# EAGLE board BasesXBee (EAGLE 5.07)
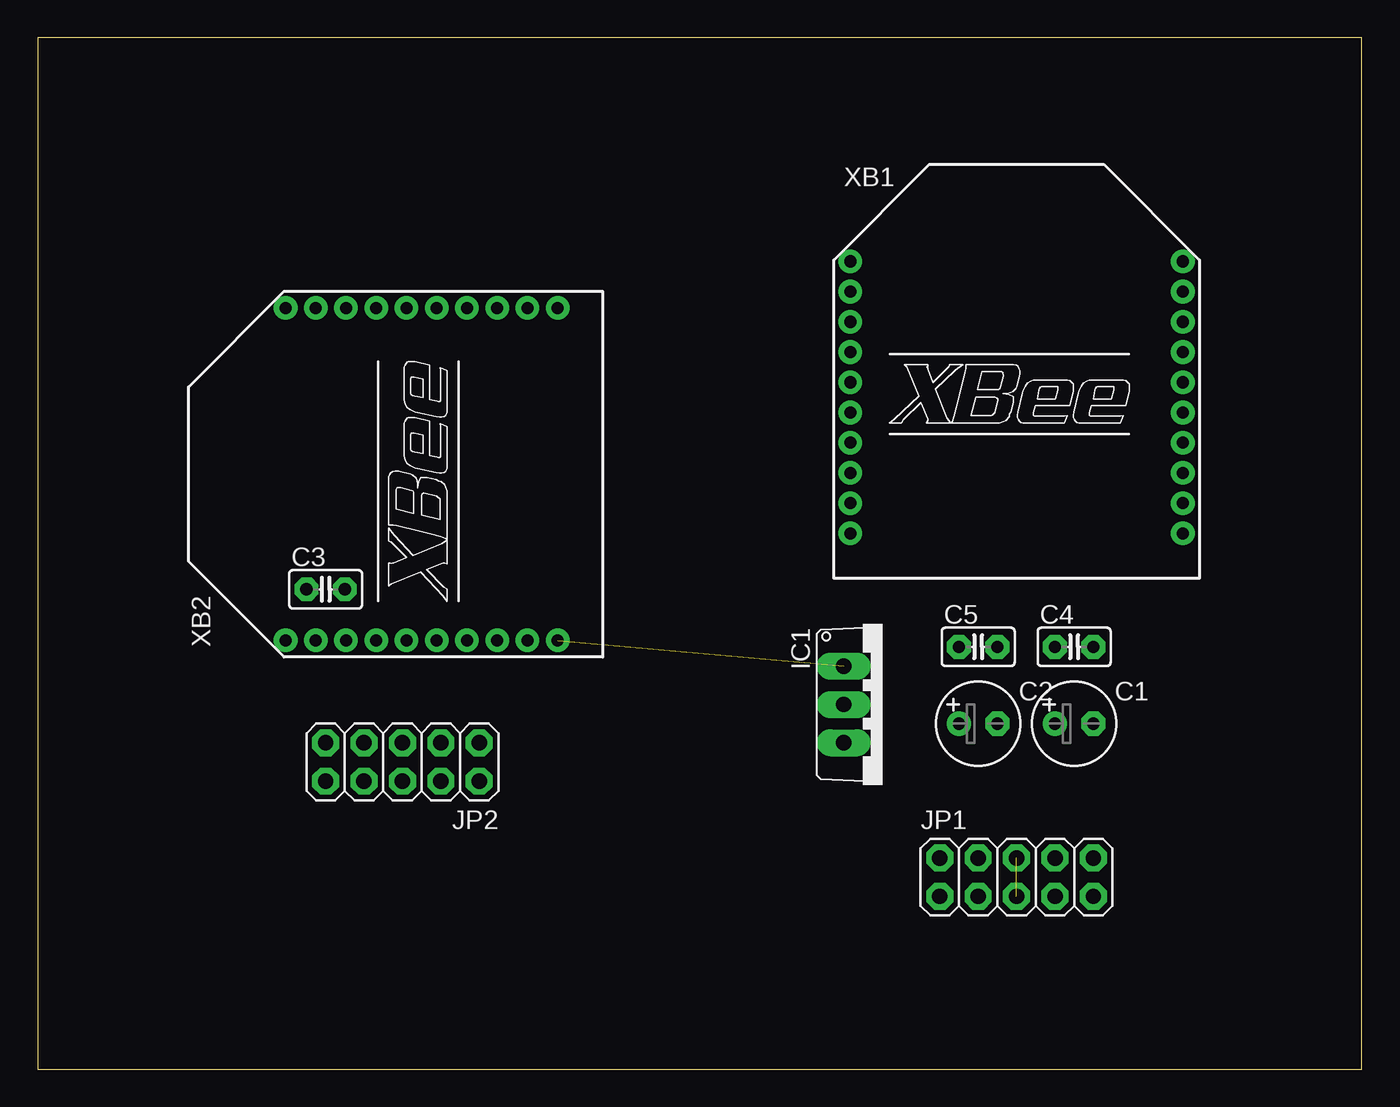
[diagram p0: board, top side]
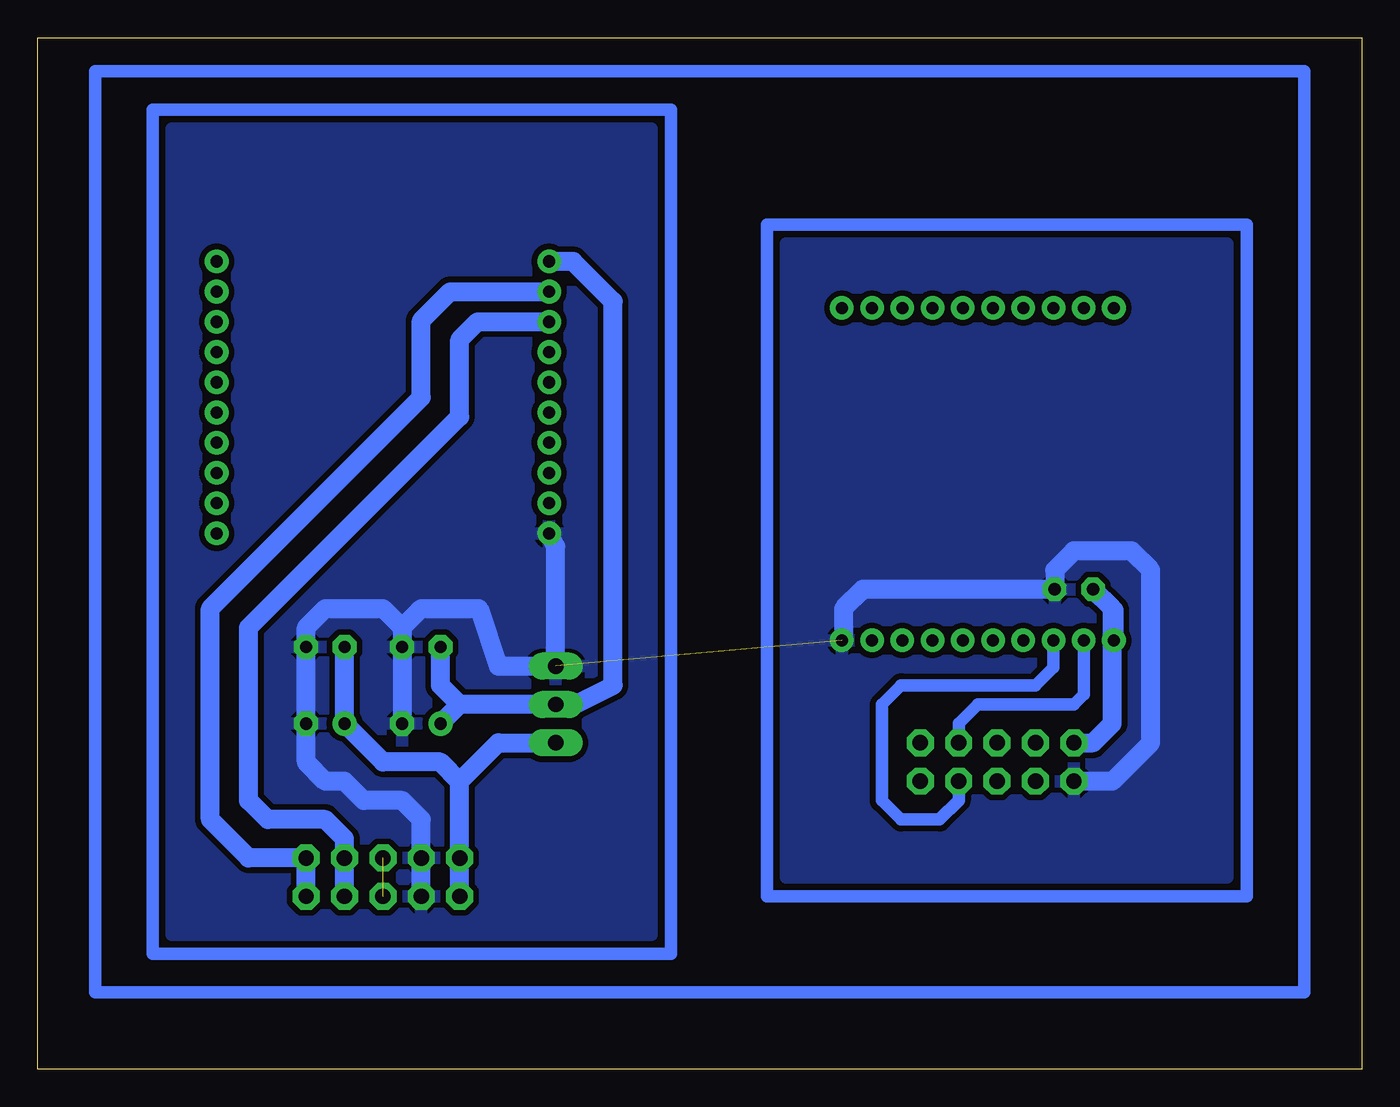
[diagram p1: board, bottom side, seen from below]

Size 87.61 x 68.25 mm. Coordinates in mm from the lower left corner, seen from the top.
Outline: 0,0 87.61,0 87.61,68.25 0,68.25 0,0
Copper layers (1*16): Top 0.035mm / dielectric 1.5mm / Bottom 0.035mm
Design rules "default *": minimum track width 15mil, minimum drill 24mil, track to track 15mil, track to pad 15mil, pad to pad 15mil, via to via 15mil, smd to smd 8mil, copper to edge 40mil, drill to drill 8mil, minimum pad ring 15mil, minimum via ring 15mil, stop-mask expansion 4mil, vias tented up to drill 0mil, thermal gap 10mil

## Footprints (pad centres in the part's own frame; a part is rotated, then mirrored left to right if it is on the bottom)
E2,5-6 = drill 0.813 pad 1.6 round: + -1.27,0 | drill 0.813 pad 1.6 octagon: - 1.27,0
C025-025X050 = drill 0.813 octagon: 1 -1.27,0; 2 1.27,0
TO220V = drill 1.016 long: 1 -2.54,-2.54; 2 0,-2.54; 3 2.54,-2.54
2X05 = drill 1.016 octagon: 1 -5.08,-1.27; 2 -5.08,1.27; 3 -2.54,-1.27; 4 -2.54,1.27; 5 0,-1.27; 6 0,1.27; 7 2.54,-1.27; 8 2.54,1.27; 9 5.08,-1.27; 10 5.08,1.27
XBEE = drill 0.8 pad 1.27 round: 1 -11,9; 2 -11,7; 3 -11,5; 4 -11,3; 5 -11,1; 6 -11,-1; 7 -11,-3; 8 -11,-5; 9 -11,-7; 10 -11,-9; 11 11,-9; 12 11,-7; 13 11,-5; 14 11,-3; 15 11,-1; 16 11,1; 17 11,3; 18 11,5; 19 11,7; 20 11,9

## Placement (x,y rotation side)
C1  [E2,5-6]  68.58,22.86 0 top
C2  [E2,5-6]  62.23,22.86 0 top
C3  [C025-025X050]  19.05,31.75 0 top
C4  [C025-025X050]  68.58,27.94 0 top
C5  [C025-025X050]  62.23,27.94 0 top
IC1  LM1117T-3.3-V  [TO220V]  55.88,24.13 270 top
JP1  [2X05]  64.77,12.7 0 top
JP2  [2X05]  24.13,20.32 180 top
XB1  XBEE  [XBEE]  64.77,44.45 0 top
XB2  XBEE  [XBEE]  25.4,39.37 90 top

## Library data of the parts
C1-C5 = rcl
IC1 = lm1117
JP1 JP2 = pinhead
XB1 XB2 = maxstream

## Nets
GND: C1.- C2.- C3.2 C4.2 C5.2 IC1.1 JP1.3 JP1.4 JP2.10 XB1.10 XB2.10
N$1: C2.+ C5.1 IC1.2 XB1.1
N$2: C1.+ C4.1 IC1.3 JP1.1 JP1.2
N$8: JP1.5 JP1.6
RX_C: JP2.3 XB2.2
RXCON: JP1.9 JP1.10 XB1.2
TX_C: JP2.4 XB2.3
TXCON: JP1.7 JP1.8 XB1.3
VCCDE: C3.1 JP2.9 XB2.1

## Tracks (layer width: path | path; a pad name or v marks a point on that pad's centre or on a via)
GND  (1 unrouted)
  Bottom 1.27: JP1.3 JP1.4 62.23,16.51 63.5,17.78 66.04,17.78 67.31,19.05 68.58,19.05 69.85,20.32 C1.- C4.2 69.85,29.21 68.58,30.48 64.77,30.48 63.5,29.21 | C2.- C5.2 63.5,29.21 | XB1.10 53.34,34.61 IC1.1 57.15,26.67 58.42,30.48 62.23,30.48 63.5,29.21 | XB2.10 34.29,28.48 34.29,30.48 33.02,31.75 C3.2 20.32,33.02 19.05,34.29 15.24,34.29 13.97,33.02 13.97,21.59 16.51,19.05 JP2.10
  pour Bottom: 8.89,54.61 8.89,12.7 38.1,12.7 38.1,54.61
  pour Bottom: 46.99,62.23 46.99,8.89 78.74,8.89 78.74,62.23
N$1
  Bottom 1.27: XB1.1 52.18,53.45 49.53,50.8 49.53,25.4 52.07,24.13 IC1.2 59.69,24.13 | 59.69,24.13 C2.+ | C5.1 60.96,25.4 59.69,24.13
N$2
  Bottom 1.27: JP1.1 JP1.2 59.69,19.05 | C4.1 C1.+ 64.77,20.32 60.96,20.32 59.69,19.05 | 59.69,19.05 57.15,21.59 IC1.3
N$3
  Bottom 0.813: 3.81,66.04 83.82,66.04 83.82,5.08 3.81,5.08 3.81,66.04
N$5
  Bottom 0.813: 7.62,11.43 39.37,11.43 39.37,55.88 7.62,55.88 7.62,11.43
N$6
  Bottom 0.813: 45.72,7.62 80.01,7.62 80.01,63.5 45.72,63.5 45.72,7.62
N$8  (1 unrouted)
RX_C
  Bottom 0.813: XB2.2 18.4,24.78 19.05,24.13 25.4,24.13 26.67,22.86 JP2.3
RXCON
  Bottom 1.27: JP1.9 JP1.10 73.66,13.97 76.2,16.51 76.2,30.48 62.23,44.45 62.23,49.53 60.31,51.45 XB1.2
TX_C
  Bottom 0.813: XB2.3 20.4,26.59 21.59,25.4 30.48,25.4 31.75,24.13 31.75,17.78 30.48,16.51 27.94,16.51 26.67,17.78 JP2.4
TXCON
  Bottom 1.27: JP1.7 JP1.8 67.31,15.24 68.58,16.51 72.39,16.51 73.66,17.78 73.66,29.21 59.69,43.18 59.69,48.26 58.5,49.45 XB1.3
VCCDE
  Bottom 1.27: XB2.1 16.4,30.37 16.51,30.48 | 16.51,30.48 C3.1 | 16.51,30.48 16.51,22.86 17.78,21.59 JP2.9